# Altium PCB PreChargeAntisparkPCB_2021-10-31.pcbdoc
Units mm, origin at the board's own origin, x right, y up, seen from the top; angles counter-clockwise.
Board outline 64.21 x 57.12 mm, 2 copper layers (Top Layer, Bottom Layer); 21 components, 12 nets, 54 pads, 68 vias.
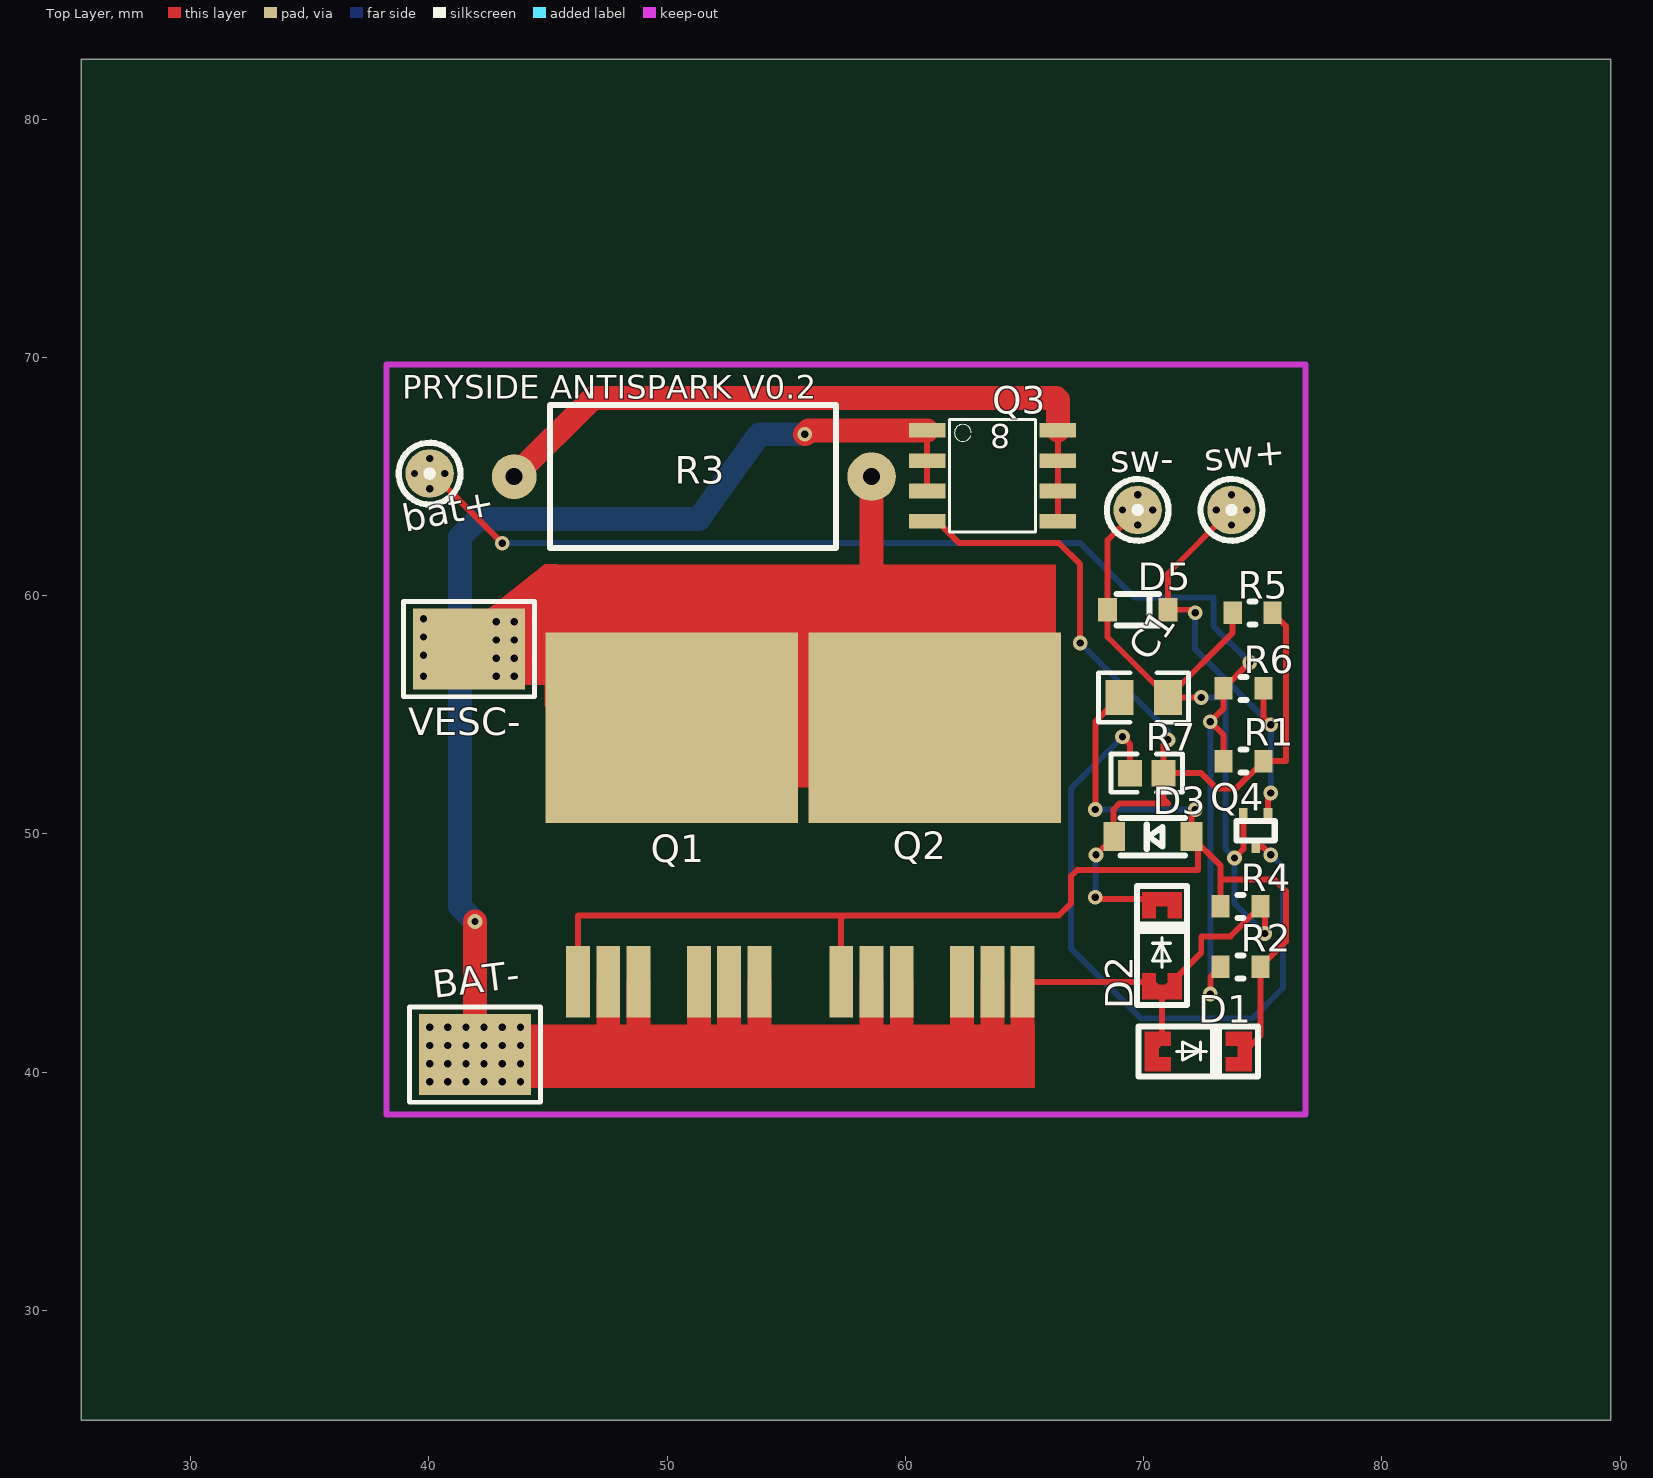
[diagram p0: Top Layer view]
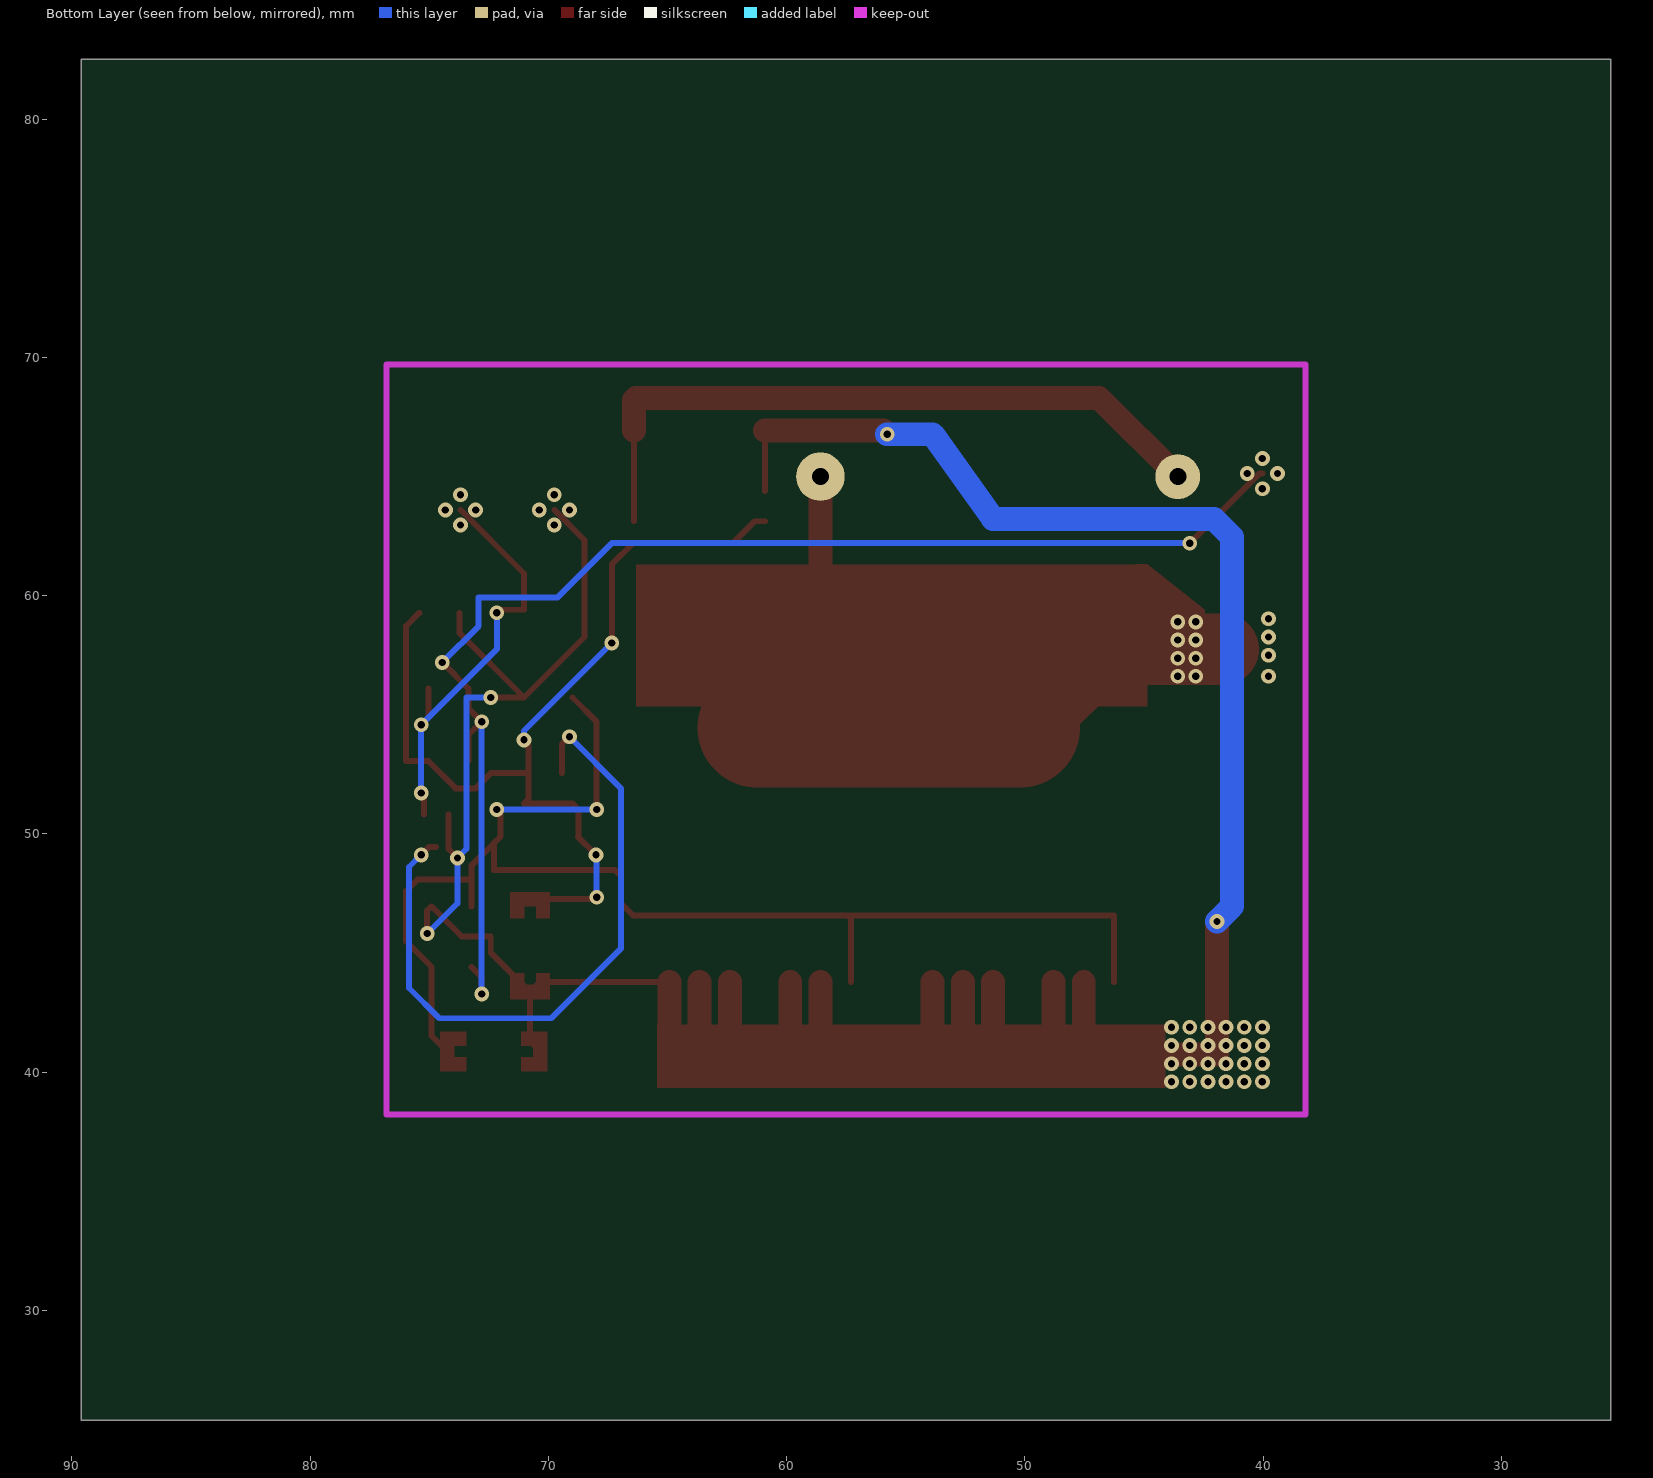
[diagram p1: Bottom Layer view, seen from below]

## Layer stack, top to bottom
Top Layer: signal copper (thickness not stored)
Dielectric: dielectric 0.32, FR-4, Dk 4.8
Bottom Layer: signal copper (thickness not stored)

## Board outline
89.611,25.4 25.4,25.4 25.4,82.525 89.611,82.525

## Components (designator, comment, footprint, x,y, rotation, side; value= is the part's Value field where it differs from the comment)
bat+ "TestPoint" TESTPOINT_2MM 40.03,65.126 r0 top
BAT- "TESTPOINT" TESTPOINT_SMT 41.935,40.742 r0 top
C1 "4.7uF" 0805 70.002,55.728 r0 top
D1 "12V" DO-213AC 72.288,40.869 r0 top
D2 "12V" DO-213AC 70.764,45.314 r90 top
D3 "Zener 0.5V" SOD-123 70.383,49.886 r0 top
D5 "10V" SOD-323 69.748,59.411 r0 top
Q1 "IRFS7530" IRFS7530-7PPBF 50.063,42.266 r0 top
Q2 "IRFS7530" IRFS7530-7PPBF 61.112,42.266 r0 top
Q3 "FDS5670" SO-8 63.398,65.126 r0 top
Q4 "NTA4001NT1G" SC-75(SOT-523) 74.701,50.14 r180 top
R1 "1M" RESC1608X60N 74.193,53.061 r0 top
R2 "1M" RESC1608X60N 74.066,44.425 r0 top
R3 "4.7" "AXIAL 6X12" 51.079,64.999 r0 top
R4 "1M" RESC1608X60N 74.066,46.965 r0 top
R5 "1M" RESC1608X60N 74.574,59.284 r180 top
R6 "100K" RESC1608X60N 74.193,56.109 r0 top
R7 "100" 0603 70.129,52.553 r0 top
sw+ "TestPoint" TESTPOINT_2MM 73.685,63.602 r0 top
sw- "TestPoint" TESTPOINT_2MM 69.748,63.602 r0 top
VESC- "TESTPOINT" TESTPOINT_SMT 41.681,57.76 r0 top

## Footprints (in the part's own frame and the unit in brackets; to place one, negate y for a bottom-side part, rotate by r counter-clockwise, add the part's x,y. Pads: shape width x height; smd on the part's side, far side on the other; paste and mask are expansions set on the pad)
0603 [mm]
  rect 1x1.1 smd: 1(-0.7,0) 2(0.7,0)
  silkscreen extent -1.5,-0.8 1.5,0.8
0805 [mm]
  rect 1.16x1.45 smd: 1(-1.016,0) 2(1.016,0)
  silkscreen extent -1.9,-1.03 1.87,1.04
"AXIAL 6X12" [mil]
  round 74 hole 27.95: 1(-295.28,0)
  round 80 hole 27.95: 2(295.28,0)
  silkscreen extent -236,-118 236,118
DO-213AC [mm]
  round 0 smd: 1(-1.951,0) 2(1.951,0)
  Top Layer region: 1.151,-0.826 2.25,-0.826 2.25,0.826 1.151,0.826 1.151,0.249 1.651,0.249 1.651,-0.249 1.151,-0.249
  Top Layer region: -1.151,-0.826 -2.25,-0.826 -2.25,0.826 -1.151,0.826 -1.151,0.249 -1.651,0.249 -1.651,-0.249 -1.151,-0.249
  silkscreen extent -2.5,-1.05 2.5,1.05
IRFS7530-7PPBF [mm]
  rect 1x3 smd: 1(-3.808,1.522) 3(-2.54,1.524) 3(-1.27,1.524) 3(1.267,1.527) 3(2.537,1.527) 3(3.807,1.527)
  rect 10.6x8 smd: 2(0.127,12.192)
RESC1608X60N [mil]
  rect 30x37 smd: 1(-33,0) 2(33,0)
  silkscreen extent -5,-19 5,19
SC-75(SOT-523) [mm]
  rect 0.36x0.53 smd: 1(-0.009,0.682) 2(-0.515,-0.682) 3(0.515,-0.681)
  silkscreen extent -0.8,-0.4 0.81,0.41
SO-8 [mil]
  rect 60x24 smd: 1(-97.89,71.26) 2(-97.89,21.26) 3(-97.89,-28.74) 4(-97.89,-78.74) 5(118.11,-78.74) 6(118.11,-28.74) 7(118.11,21.26) 8(118.11,71.26)
  silkscreen extent -61,-97 81,89
SOD-123 [mil]
  rect 35.8x48 smd: 1(64,0) 2(-64,0)
  silkscreen extent -53,-31 53,31
SOD-323 [mm]
  rect 0.8x1 smd: 1(-1.27,0) 2(1.27,0)
  silkscreen extent -0.89,-0.66 0.89,0.66
TESTPOINT_2MM [mil]
  round 80 smd: 1(0,0)
  silkscreen extent -51,-51 51,51
TESTPOINT_SMT [mm]
  rect 4.7x3.4 smd: P$1(0,0)
  silkscreen extent -2.75,-2 2.75,2

## Via types
v1: diameter 0.62, hole 0.305, Top Layer to Bottom Layer, 68 vias

## Nets (pads, with @x,y where several pads share a name; then routed paths per layer and width w, separated by ;. In a path a pad name is that pad's centre, name@x,y a point inside that pad or via, vN(x,y) a via of type N, cw(c..) or ccw(c..) an arc to the next point about the centre after c; other vN are vias at no path point)
D2_2: D2.2 D3.2 Q3.4 R1.2 R5.1 R7.2 | length 40.5
  Top Layer w0.25: Q3.4 61.334,63.126 62.255,62.205 66.446,62.205 67.335,61.316 v1(67.335,58.014) ; v1(67.97,47.346) 68.052,47.264 D2.2 ; v1@67.97,49.124 v1(67.996,49.124) D3.2 68.732,49.911 68.732,51.029 68.986,51.283 71.018,51.283 70.829,51.472 R7.2 ; v1(71.018,53.95) 70.829,53.761 R7.2 ; R5.1 75.971,58.725 75.971,53.061 R1.2 73.889,51.918 73.05,51.918 72.415,52.553 R7.2
  Bottom Layer w0.25: v1(67.335,58.014) 71.018,54.331 v1(71.018,53.95) ; v1(67.97,47.346) 67.97,49.098 v1(67.996,49.124)
GND: BAT-.P$1 C1.2 D1.1 D2.1 D5.1 Q1.3 Q2.3 Q3.1 Q3.2 Q3.3 Q4.3 R4.2 R5.2 sw-.1 | length 144.9
  Top Layer w0.25: Q3.3 Q3.2 Q3.1 ; Q2.3@64.92,43.792 70.335,43.792 D2.1 ; sw-.1 68.478,62.332 D5.1 68.478,58.268 C1.2 ; D1.1 70.764,41.295 D2.1 ; v1(72.415,55.728) C1.2 ; R5.2 73.736,58.445 C1.2 ; v1(73.812,48.997) 74.186,49.37 Q4.3 ; v1(75.082,45.822) 75.082,46.787 R4.2 73.635,45.695 72.415,45.695 72.415,45.014 D2.1
  Top Layer w1: v1(41.935,46.33) BAT-.P$1 64.922,40.742 64.92,40.744 Q2.3@64.92,43.792 ; 47.523,40.742 Q1.3@47.523,43.79 ; 48.793,40.742 Q1.3@48.793,43.79 ; 51.331,40.742 Q1.3@51.331,43.792 ; 52.601,40.742 Q1.3@52.601,43.792 ; 53.871,40.742 Q1.3@53.871,43.792 ; v1(55.778,66.777) 55.937,66.936 Q3.1 ; 58.572,40.742 Q2.3@58.572,43.79 ; 59.842,40.742 Q2.3@59.842,43.79 ; 62.38,40.742 Q2.3@62.38,43.792 ; 63.65,40.742 Q2.3@63.65,43.792
  Bottom Layer w0.25: v1(72.415,55.728) 73.431,55.728 73.431,49.378 v1(73.812,48.997) 73.812,47.092 v1(75.082,45.822)
  Bottom Layer w1: v1(41.935,46.33) 41.3,46.965 41.3,62.459 42.062,63.221 51.333,63.221 53.873,66.777 v1(55.778,66.777)
  other v1: 69.748,62.967 69.113,63.602 70.383,63.602 69.748,64.237
Q1_1: C1.1 D1.2 D3.1 Q1.1 Q2.1 R2.2 R4.1 | length 59
  Top Layer w0.25: Q1.1 46.255,46.584 57.429,46.584 ; Q2.1 57.304,46.459 57.429,46.584 ; v1(67.97,51.029) 67.97,54.712 C1.1 ; v1(72.161,51.029) 72.009,50.876 D3.1 ; R4.1 73.228,48.666 D3.1 ; 73.228,48.082 75.489,48.082 75.971,47.6 75.971,45.491 R2.2 74.905,41.534 D1.2 ; 57.429,46.584 66.446,46.584 66.954,47.092 66.954,48.235 67.208,48.489 72.288,48.489 72.288,49.606 D3.1
  Bottom Layer w0.25: v1(67.97,51.029) v1(72.161,51.029)
R3_1: Q3.5 Q3.6 Q3.7 Q3.8 R3.1 | length 29.3
  Top Layer w0.25: Q3.5 Q3.6 Q3.7 Q3.8
  Top Layer w1: R3.1 46.881,68.301 66.319,68.301 66.398,68.222 Q3.8
R7_1: Q4.1 R7.1 | length 28.6
  Top Layer w0.25: v1(69.113,54.077) 69.429,53.761 R7.1 ; Q4.1 75.002,49.458 v1(75.336,49.124)
  Bottom Layer w0.25: v1(69.113,54.077) 66.954,51.918 66.954,45.187 69.875,42.266 74.574,42.266 75.844,43.536 75.844,48.616 v1(75.336,49.124)
S$11: 
S$13: 
S$67: 
S$69: 
SWITCH+: D5.2 Q4.2 R6.2 sw+.1 | length 18
  Top Layer w0.25: v1(72.161,59.284) 72.034,59.411 D5.2 71.018,60.935 sw+.1 ; R6.2 75.032,54.889 v1(75.336,54.585) ; Q4.2 75.217,51.6 v1(75.336,51.72)
  Bottom Layer w0.25: v1(72.161,59.284) 72.161,57.76 v1(75.336,54.585) v1(75.336,51.72)
  other v1: 73.685,62.967 73.05,63.602 74.32,63.602 73.685,64.237
VCC: bat+.1 R1.1 R2.1 R6.1 | length 56.3
  Top Layer w0.25: bat+.1 40.157,65.126 v1(43.078,62.205) ; v1(72.796,43.282) 72.796,43.993 R2.1 ; R1.1 73.355,54.153 v1(72.796,54.712) 73.355,55.27 R6.1 v1(74.447,57.201) v1@74.447,57.252
  Bottom Layer w0.25: v1(43.078,62.205) 67.335,62.205 69.621,59.919 72.923,59.919 72.923,58.725 v1(74.447,57.201) ; v1(72.796,43.282) v1(72.796,54.712)
  other v1: 40.03,64.491 39.395,65.126 40.665,65.126 40.03,65.761
VESC-: Q1.2 Q2.2 R3.2 VESC-.P$1 | length 32.6
  Top Layer w1: R3.2 58.58,57.117 Q2.2
  Top Layer w3: VESC-.P$1 46.634,57.76 49.936,54.458 Q1.2
  Top Layer w5: Q1.2 Q2.2
copper on no net:
  other v1: 40.03,39.599 40.792,39.599 41.554,39.599 42.316,39.599 43.078,39.599 43.84,39.599 40.03,40.361 40.792,40.361 41.554,40.361 42.316,40.361 43.078,40.361 43.84,40.361 40.03,41.123 40.792,41.123 41.554,41.123 42.316,41.123 43.078,41.123 43.84,41.123 40.03,41.885 40.792,41.885 41.554,41.885 42.316,41.885 43.078,41.885 43.84,41.885 39.776,56.617 42.824,56.617 43.586,56.617 42.824,57.379 43.586,57.379 39.776,57.506 42.824,58.141 43.586,58.141 39.776,58.268 42.824,58.903 43.586,58.903 39.776,59.03

## Other copper
Top Layer:
  region net VESC-: 44.856,61.316 42.443,59.411 42.443,58.776 45.364,59.03 45.364,61.316 44.856,61.316 44.602,59.284
  rectangle: 44.094,39.345 65.43,42.012
  rectangle: 44.856,55.347 66.319,61.316

## Silkscreen, mask and mechanical layers (free items; w line width, h text height)
Top Overlay:
  text "PRYSIDE ANTISPARK V0.2" at 38.887,68.271 h1
Top Paste:
  rectangle: 44.983,39.345 65.43,42.012
Top Solder:
  rectangle: 44.044,39.294 65.481,42.062
  rectangle: 44.044,39.294 65.481,42.062
  rectangle: 44.044,39.294 65.481,42.062
  rectangle: 44.044,39.294 65.481,42.062
  rectangle: 44.044,39.294 65.481,42.062
  rectangle: 44.044,39.294 65.481,42.062
  rectangle: 44.044,39.294 65.481,42.062
  rectangle: 44.044,39.294 65.481,42.062
  rectangle: 44.044,39.294 65.481,42.062
  rectangle: 44.044,39.294 65.481,42.062
  region: 43.713,56.236 45.11,56.236 45.11,51.918 49.047,51.918 55.27,51.918 57.175,51.918 62.636,51.918 66.319,51.918 66.319,58.268 66.319,61.316 57.302,61.316 44.856,61.316 42.443,59.411 42.316,56.617 42.443,56.617

## Text inside footprints (layer, text, board x,y; h text height)
Q3: Top Overlay "8" at 64.417,67.19 h1.02 r180